# Altium PCB Test_TG21.PcbDoc
Units mm, origin at the board's own origin, x right, y up, seen from the top; angles counter-clockwise.
Board outline 54 x 92 mm, 2 copper layers (Top Layer, Bottom Layer); 28 components, 17 nets, 88 pads, 14 vias.
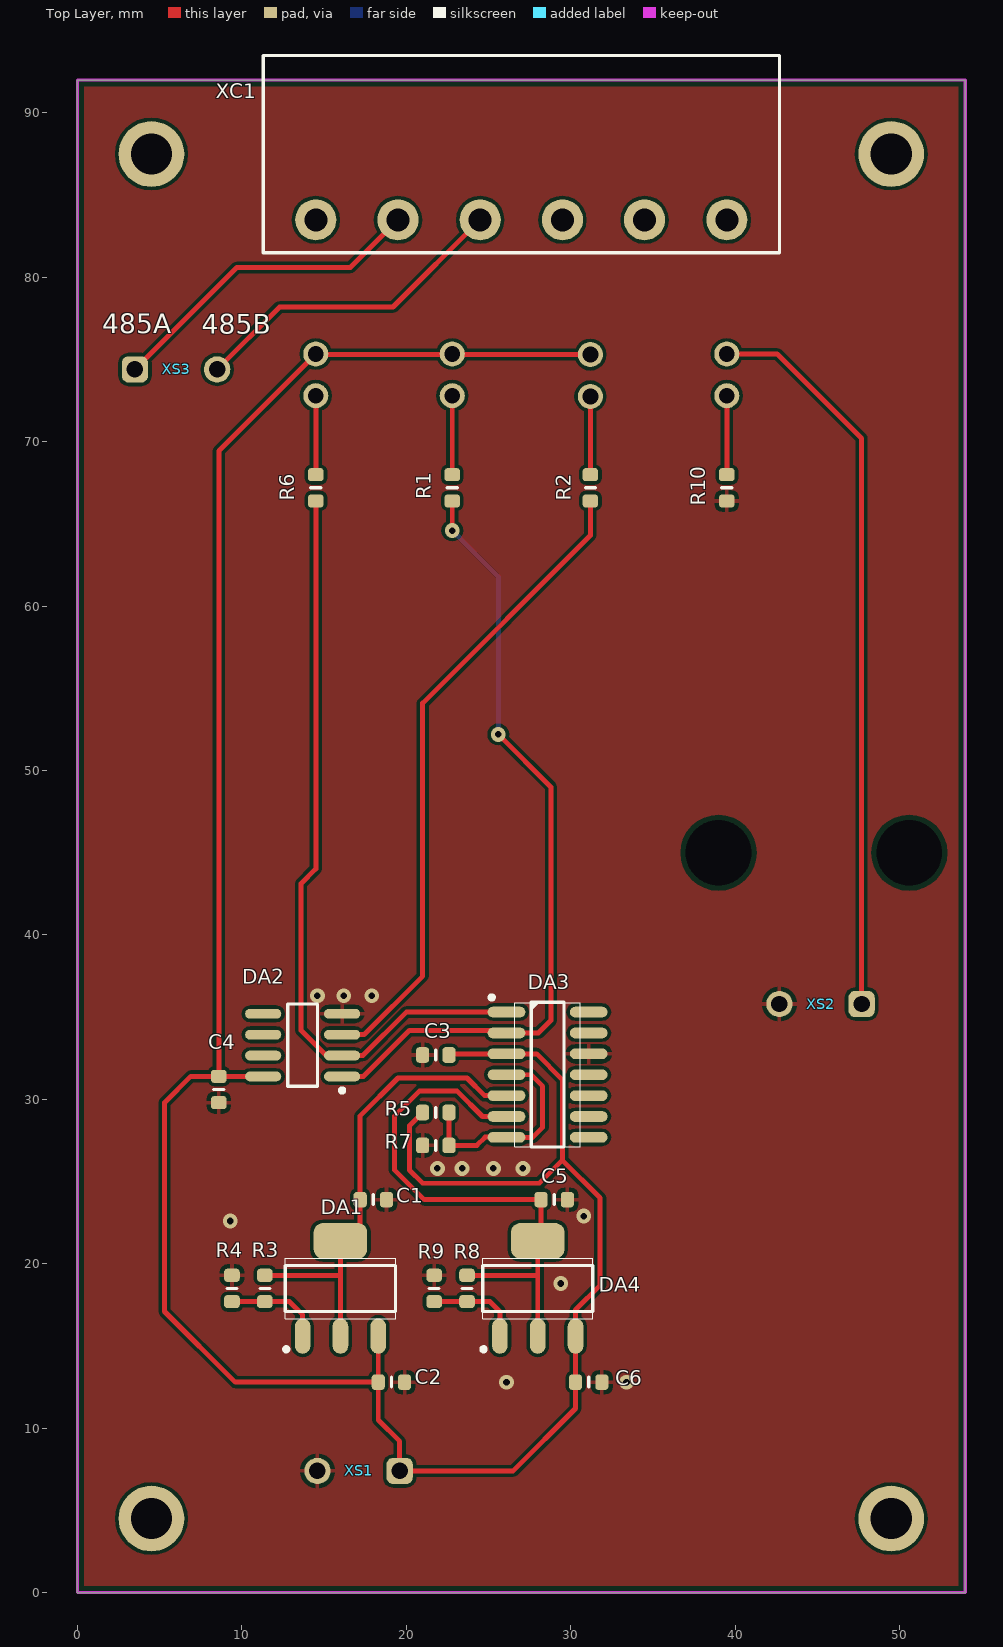
[diagram p0: Top Layer view]
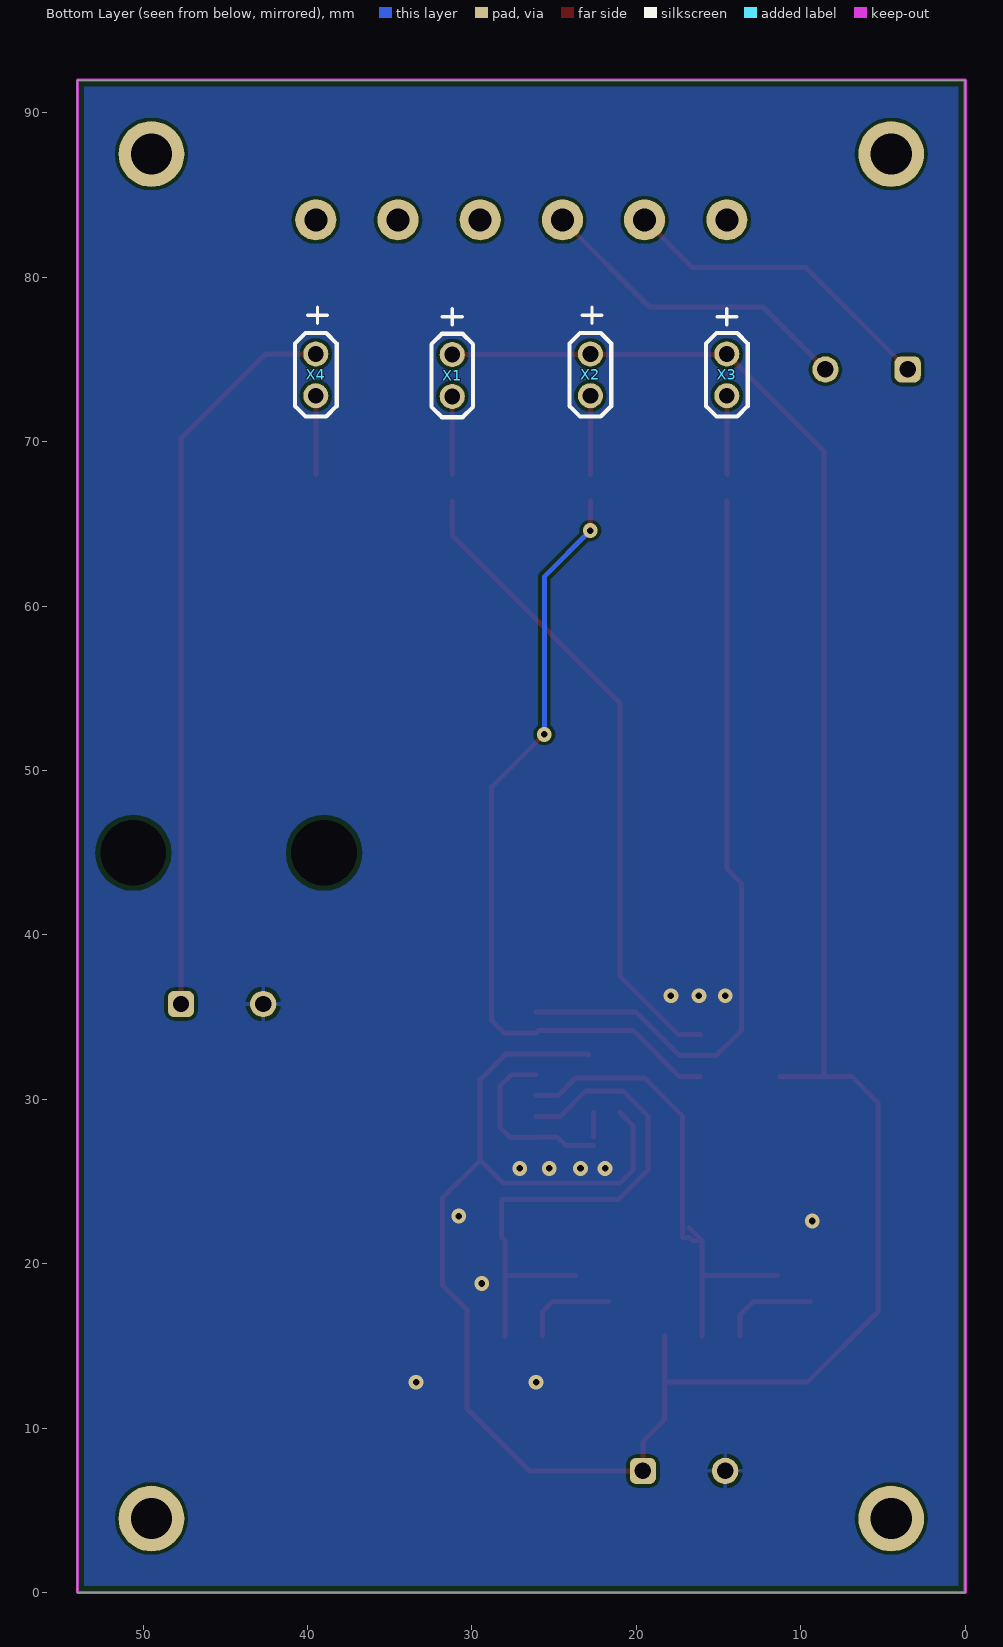
[diagram p1: Bottom Layer view, seen from below]
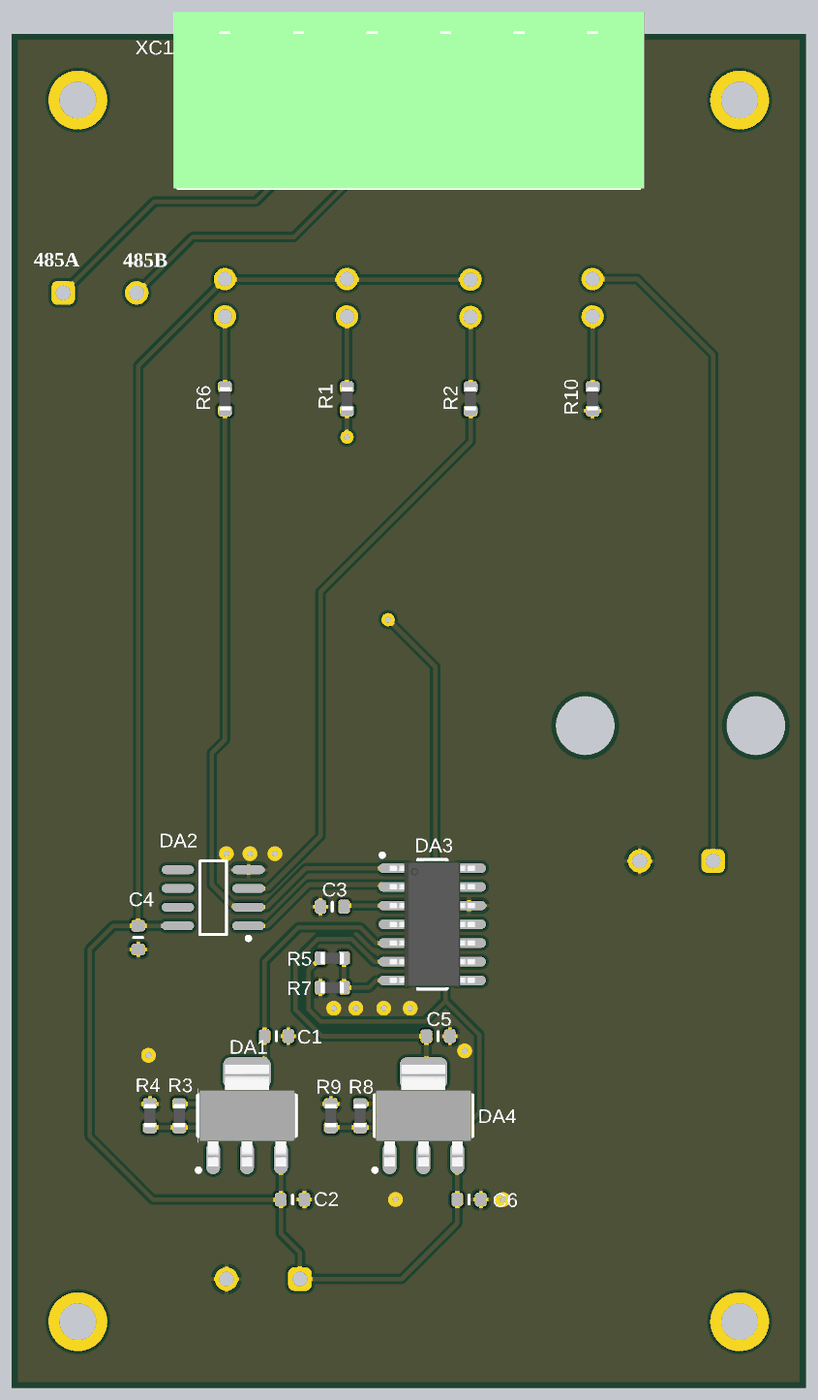
[diagram p2: 3D render of the assembled board from above, using the file's embedded part models]

## Layer stack, top to bottom
Top Layer: signal copper 0.0356
Dielectric: dielectric 0.32, FR-4, Dk 4.8
Bottom Layer: signal copper 0.0356

## Board outline
0,0 54,0 54,92 0,92

## Design rules (kind name [scope] priority, off if disabled: settings)
Clearance No_con [(ObjectKind = 'Pad') And (Net = 'No Net') And (HoleDiameter = AsMM(4))] p1: gap=0.3
Clearance Clearance_1 [IsKeepOut] p2: gap=0.3
Clearance [All] p3: gap=0.2
ComponentClearance [All] p1 off: gap=0.254 collisioncheckmode=3 verticalgap=0.254 showdistances=FALSE
HoleSize [All] p1: absolutevalues=TRUE maxlimit=4 minlimit=0.025 maxpercent=80.000 minpercent=20.000
MinimumSolderMaskSliver [All] p1: minsoldermaskwidth=0.05
PolygonConnect VIA_1 [ISVIA vs InNet('GND')] p1: connectstyle=Direct reliefconductorwidth=0.254 reliefentries=4 polygonreliefangle="90 Angle" airgapwidth=0.254
PolygonConnect GND [IsNamedPolygon('gnd')] p2: connectstyle=Relief reliefconductorwidth=0.25 reliefentries=4 polygonreliefangle="90 Angle" airgapwidth=0.254
PolygonConnect Power [IsNamedPolygon('Power')] p3: connectstyle=Direct reliefconductorwidth=0.254 reliefentries=4 polygonreliefangle="90 Angle" airgapwidth=0.254
RoutingVias [All] p1: holewidth=0.4 width=0.9 viastyle="Through Hole" minholewidth=0.3 minwidth=0.7 maxholewidth=4 maxwidth=6
SilkToSilkClearance [All] p1 off: silktosilkclearance=0.254
SilkscreenOverComponentPads [All] p1 off: minsilkscreentomaskgap=0.254
SolderMaskExpansion VIA [IsVia] p1: expansion=-0.55
SolderMaskExpansion [All] p2: expansion=0.05
Width Reper [InComponent('REP1') Or InComponent('REP2') Or InComponent('REP3') Or InComponent('REP4')] p1: maxlimit=0.254 minlimit=0 preferedwidth=0
Width [All] p2: maxlimit=1 minlimit=0.2 preferedwidth=0.2
23 further rules are at their usual default settings.

## Components (designator, comment, footprint, x,y, rotation, side; value= is the part's Value field where it differs from the comment)
C1 "чип 0603 0.1uF/50V," CAPC1608X50(0603) 18,23.9 r180 top
C2 "чип 0603 0.1uF/50V," CAPC1608X50(0603) 19.1,12.8 r180 top
C3 "чип 0603 0.1uF/50V," CAPC1608X50(0603) 21.8,32.7 r0 top
C4 "чип 0603 0.1uF/50V," CAPC1608X50(0603) 8.6,30.6 r90 top
C5 "чип 0603 0.1uF/50V," CAPC1608X50(0603) 29,23.9 r180 top
C6 "чип 0603 0.1uF/50V," CAPC1608X50(0603) 31.1,12.8 r180 top
DA1 "LM317LZ/LFT3(TO-92)" SOT230P700X180-4N(SOT223)_NUM 16,18.5 r90 top
DA2 "CD40107BM96(SOIC-8)" SOIC127P600-8N 13.7,33.3 r180 top
DA3 "LM2901MX(SO-14)" SOIC127P600X145-14M 28.6,31.5 r0 top
DA4 "LM317LZ/LFT3(TO-92)" SOT230P700X180-4N(SOT223)_NUM 28,18.5 r90 top
R1 "чип 0603 1K 5%" RESC1608X45(0603) 22.8,67.2 r90 top
R2 "чип 0603 1K 5%" RESC1608X45(0603) 31.2,67.2 r90 top
R3 "чип 0603 118 1%" RESC1608X45(0603) 11.4,18.5 r270 top
R4 "чип 0603 590 1%" RESC1608X45(0603) 9.4,18.5 r270 top
R5 "чип 0603 10K 5%" RESC1608X45(0603) 21.8,29.2 r180 top
R6 "чип 0603 1K 5%" RESC1608X45(0603) 14.5,67.2 r90 top
R7 "чип 0603 10K 5%" RESC1608X45(0603) 21.8,27.2 r0 top
R8 "чип 0603 200 1%" RESC1608X45(0603) 23.7,18.5 r270 top
R9 "чип 0603 590 1%" RESC1608X45(0603) 21.7,18.5 r270 top
R10 "чип 0603 1K 5%" RESC1608X45(0603) 39.5,67.2 r270 top
X1 "JMP" JMP 31.2,75.3 r0 bottom
X2 "JMP" JMP 22.8,72.8 r180 bottom
X3 "JMP" JMP 14.5,75.34 r0 bottom
X4 "JMP" JMP 39.5,72.8 r180 bottom
XC1 "WEILAND 25.332.3653.0" WEILAND_25.332.3653.0 39.5,83.5 r90 top locked
XS1 "Degson 305-021-11" 305-021-11 17,7 r180 top
XS2 "Degson 305-021-11" 305-021-11 45.1,35.4 r180 top
XS3 "Degson 305-021-11" 305-021-11 6.1,74.8 r0 top

## Footprints (in the part's own frame and the unit in brackets; to place one, negate y for a bottom-side part, rotate by r counter-clockwise, add the part's x,y. Pads: shape width x height; smd on the part's side, far side on the other; paste and mask are expansions set on the pad)
305-021-11 [mm] "Клеммник 2 контакта"
  rrect50% 1.6x1.6 hole 1: 1(-2.6,-0.4)
  round 1.6 hole 1: 2(2.4,-0.4)
CAPC1608X50(0603) [mm]
  rrect50% 0.8x0.95 smd paste-0.025 mask+0.105: 1(-0.8,0) 2(0.8,0)
  silkscreen extent 0,-0.3 0,0.3, body extent -0.8,-0.4 0.8,0.4, height 0.5
JMP [mil]
  round 60 hole 38: 1(0,0) 2(0,100)
  silkscreen extent -50,-50 50,150
RESC1608X45(0603) [mm]
  rrect50% 0.8x0.95 smd paste-0.025 mask+0.105: 1(-0.8,0) 2(0.8,0)
  silkscreen extent 0,-0.3 0,0.3, body extent -0.8,-0.4 0.8,0.4, height 0.5
SOIC127P600-8N [mm] "SOIC, 8-Leads, Body 4.9x3.9mm, Pitch 1.27mm, IPC Medium Density"
  oval 2.2x0.6 smd: 1(-2.4,1.905) 2(-2.4,0.635) 3(-2.4,-0.635) 4(-2.4,-1.905) 5(2.4,-1.905) 6(2.4,-0.635) 7(2.4,0.635) 8(2.4,1.905)
  silkscreen extent -2.53,-2.5 0.9,2.88, body extent -2,-2.5 2,2.5, height 1.75
SOIC127P600X145-14M [mm]
  oval 2.3x0.65 smd: 1(-2.5,3.81) 2(-2.5,2.54) 3(-2.5,1.27) 4(-2.5,0) 5(-2.5,-1.27) 6(-2.5,-2.54) 7(-2.5,-3.81) 8(2.5,-3.81) 9(2.5,-2.54) 10(2.5,-1.27) 11(2.5,0) 12(2.5,1.27) 13(2.5,2.54) 14(2.5,3.81)
  silkscreen extent -3.52,-4.4 2,4.82, body extent -2.9,-4.27 2.9,4.28, height 1.75
SOT230P700X180-4N(SOT223)_NUM [mm]
  oval 2.15x0.95 smd: 1(-2.9,2.3) 2(-2.9,0) 3(-2.9,-2.3)
  rrect50% 2.15x3.25 smd: 4(2.9,0)
  silkscreen extent -3.82,-3.35 1.85,3.42, body extent -3.47,-3.25 3.47,3.25, height 1.64
WEILAND_25.332.3653.0 [mm] "WEILAND_6PIN_5MM"
  round 2.5 hole 1.4: 1(0,0) 2(0,5) 3(0,10) 4(0,15) 5(0,20) 6(0,25)
  silkscreen extent -2,-3.2 10,28.2, body extent -2,-3.5 10,28.5, height 8.5

## Part data
C1 C2 C3 C4 C5 C6: library part C0603, "C0603"
DA1 DA4: library part Lm317l-n, "3-Terminal Adjustable Regulator"
DA2: library part CD40107B, "CMOS Dual 2-Input NAND Buffer/Driver"
DA3: library part LM2901
R1 R2 R3 R4 R5 R6 R7 R8 R9 R10: library part R0603, "R0603"
XC1: library part WEILAND_6PIN_5MM, "WEILAND_6PIN_5MM"
XS1 XS2 XS3: library part 305-021-11, "Клеммник винтовой, 2-контактный, 5мм, прямой"

## Free pads (board coordinates)
  round 4 hole 2.5: 0(4.5,4.5) 0(4.5,87.5) 0(49.5,4.5) 0(49.5,87.5)
  round 1.524 hole 4 unplated: 0(39,45) 1(50.6,45)

## Via types
v1: diameter 0.9, hole 0.4, Top Layer to Bottom Layer, 14 vias

## Nets (pads, with @x,y where several pads share a name; then routed paths per layer and width w, separated by ;. In a path a pad name is that pad's centre, name@x,y a point inside that pad or via, vN(x,y) a via of type N, cw(c..) or ccw(c..) an arc to the next point about the centre after c; other vN are vias at no path point)
5V: C5.2 DA3.6 DA4.2 DA4.4 R8.1 | length 33.7
  Top Layer w0.3: R8.1 28,19.3 ; DA3.6 24.64,28.96 23.1,30.5 20.8,30.5 19.3,29 19.3,25.7 21.1,23.9 C5.2 28.2,21.6 DA4.4 28,19.3 ; DA4.2 28,19.3
7.5V: C1.2 DA1.2 DA1.4 DA3.5 R3.1 | length 30.5
  Top Layer w0.3: R3.1 16,19.3 ; DA1.2 16,18.5 DA1.4 ; DA1.4@16.8,22.2 DA1.4 ; DA3.5 24.77,30.23 23.7,31.3 19.5,31.3 17.2,29 C1.2 17.2,21.6 16.8,21.6 16.6,21.4 DA1.4
13V: C2.2 C3.2 C4.2 C6.2 DA1.3 DA2.8 DA3.3 DA4.3 R5.2 X1.1 X2.2 X3.1 XS1.1 | length 161.2
  Top Layer w0.3: DA2.8 11.295,31.4 C4.2 ; C2.2 9.6,12.8 5.3,17.1 5.3,29.8 6.9,31.4 C4.2 ; DA1.3 18.3,10.5 19.6,9.2 XS1.1 26.5,7.4 30.3,11.2 C6.2 DA4.3 30.3,17.2 31.8,18.7 31.8,24 29.5,26.3 ; R5.2 20.2,28.4 20.2,25.7 21,24.9 28.1,24.9 29.5,26.3 ; C3.2@22.9,32.7 22.97,32.77 DA3.3 27.93,32.77 29.5,31.2 29.5,26.3 ; X1.1 14.54,75.3 X3.1 8.6,69.44 C4.2
13V_2: X4.2 XS2.1 | length 44.7
  Top Layer w0.3: X4.2 42.56,75.34 47.7,70.2 XS2.1
485A: XC1.5 XS3.1 | length 19.8
  Top Layer w0.3: XS3.1 9.7,80.6 16.6,80.6 XC1.5
485B: XC1.4 XS3.2 | length 19.8
  Top Layer w0.3: XS3.2 12.3,78.2 19.2,78.2 XC1.4
GND: C1.1 C2.1 C3.1 C4.1 C5.1 C6.1 DA2.4 DA3.12 R4.1 R7.1 R9.1 R10.2 XS1.2 XS2.2
  other v1: 26.1,12.8 33.4,12.8 29.4,18.8 9.3,22.6 30.8,22.9 21.9,25.8 23.4,25.8 25.3,25.8 27.1,25.8 14.6,36.3 16.2,36.3 17.9,36.3
NetDA1_1: DA1.1 R3.2 R4.2 | length 5.9
  Top Layer w0.3: R4.2 R3.2 12.9,17.7 13.7,16.9 DA1.1
NetDA2_1: DA2.1 DA3.2 R1.1 | length 48.3
  Top Layer w0.3: DA2.1 17.395,31.395 20.2,34.2 25.94,34.2 DA3.2 28.04,34.04 28.8,34.8 28.8,49 v1(25.6,52.2) ; v1(22.8,64.6) R1.1
  Bottom Layer w0.3: v1(22.8,64.6) 25.6,61.8 v1(25.6,52.2)
NetDA2_2: DA2.2 DA3.1 R6.1 | length 46.8
  Top Layer w0.3: R6.1 14.5,44.02 13.6,43.12 13.6,34.2 15.135,32.665 DA2.2 17.365,32.665 20.01,35.31 DA3.1
NetDA2_3: DA2.3 R2.1 | length 39.5
  Top Layer w0.3: DA2.3 17.435,33.935 21,37.5 21,54.1 31.2,64.3 R2.1
NetDA3_4: DA3.4 DA3.7 R5.1 R7.2 | length 12.7
  Top Layer w0.3: R7.2 24.3,27.2 24.8,27.7 26.09,27.7 DA3.7 27.69,27.69 28.3,28.3 28.3,30.8 27.6,31.5 DA3.4 ; 22.6,27.7 R5.1
NetDA4_1: DA4.1 R8.2 R9.2 | length 5.7
  Top Layer w0.3: R9.2 R8.2 25.1,17.7 25.7,17.1 DA4.1
NetR1_2: R1.2 X2.1 | length 4.8
  Top Layer w0.3: R1.2 X2.1
NetR2_2: R2.2 X1.2 | length 4.8
  Top Layer w0.3: R2.2 X1.2
NetR6_2: R6.2 X3.2 | length 4.8
  Top Layer w0.3: R6.2 X3.2
NetR10_1: R10.1 X4.1 | length 4.8
  Top Layer w0.3: R10.1 X4.1
pads on no net: DA2.5 DA2.6 DA2.7 DA3.8 DA3.9 DA3.10 DA3.11 DA3.13 DA3.14 XC1.1 XC1.2 XC1.3 XC1.6

## Polygon pours and split planes (outlines as drawn)
GND on Top Layer "gnd" (solid, remove dead copper, pour order 4): 0,0 0,92 54,92 54,0 0,0
GND on Bottom Layer "gnd" (solid, remove dead copper, pour order 3): 0,0 0,92 54,92 54,0 0,0

## Keep-outs
Keep-Out Layer:
  the board outline again, w0.2

## Silkscreen, mask and mechanical layers (free items; w line width, h text height)
Top Overlay:
  text "485A" at 1.5,76.2 h2
  text "485B" at 7.567,76.167 h2
Bottom Overlay:
  lines w0.2: 13.9,77.6 15.1,77.6 ; 14.5,77.1 14.5,78.1 ; 22.1,77.7 23.3,77.7 ; 22.7,77.2 22.7,78.2 ; 30.6,77.6 31.8,77.6 ; 31.2,77.1 31.2,78.1 ; 38.8,77.7 40,77.7 ; 39.4,77.2 39.4,78.2